# Altium PCB Motor_Driver_HIP4082_Board_V1.3.PcbDoc
Units mil, origin at the board's own origin, x right, y up, seen from the top; angles counter-clockwise.
Board outline 3395.86 x 1840.74 mil, 2 copper layers (Top Layer, Bottom Layer); 63 components, 43 nets, 183 pads, 212 vias.
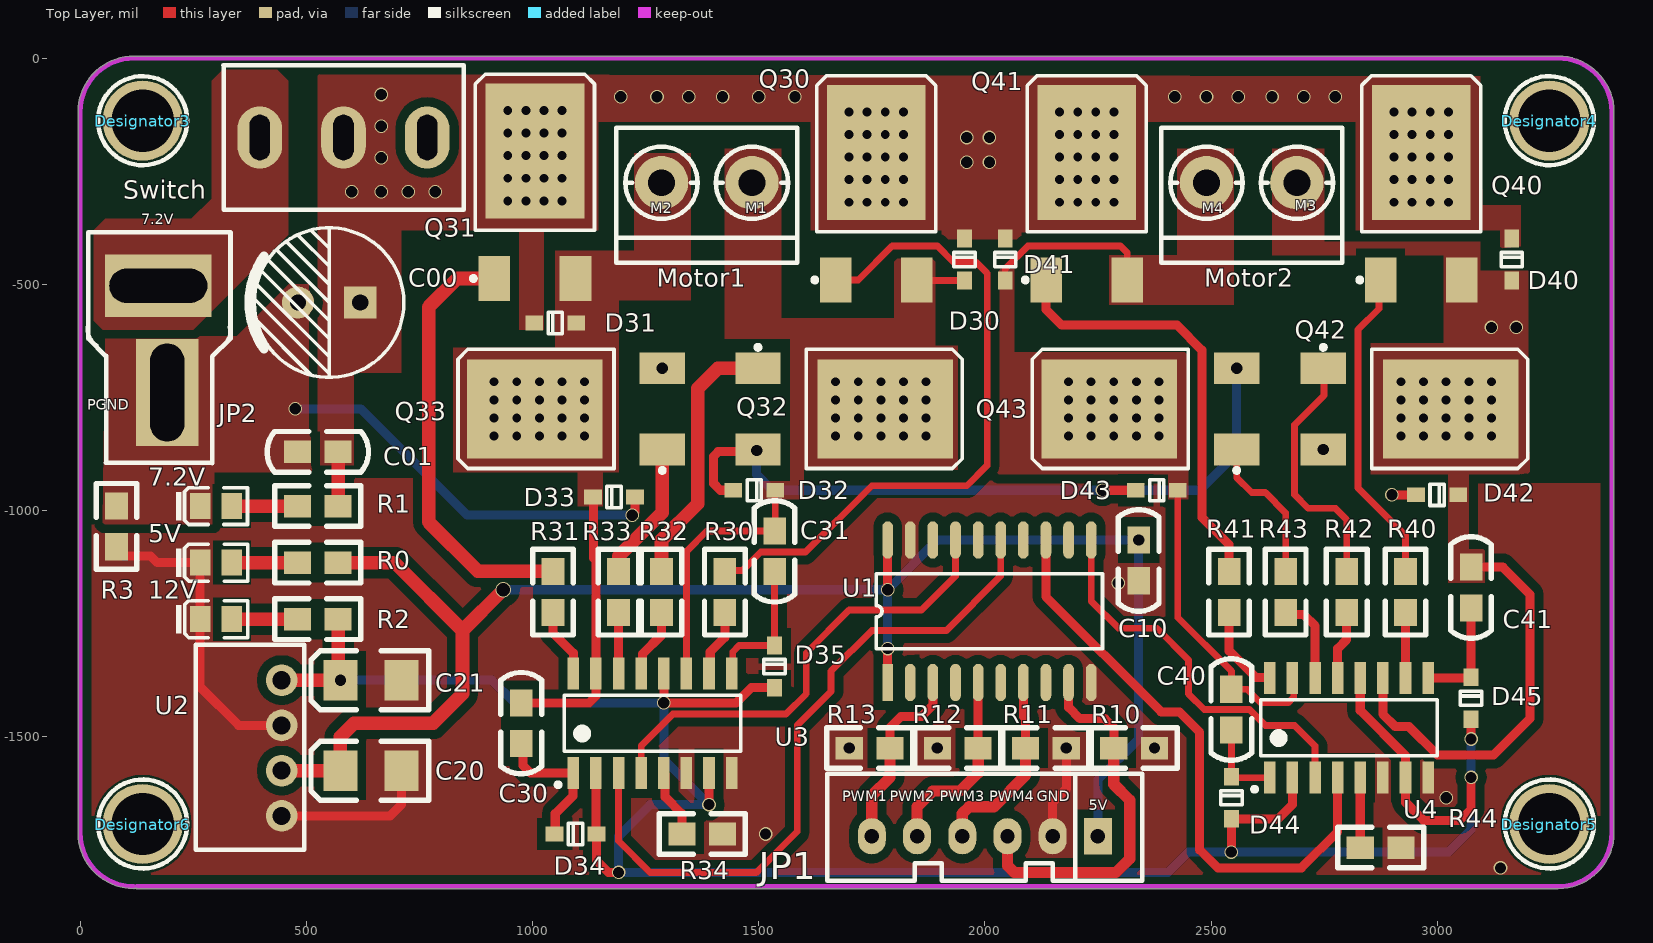
[diagram p0: Top Layer view]
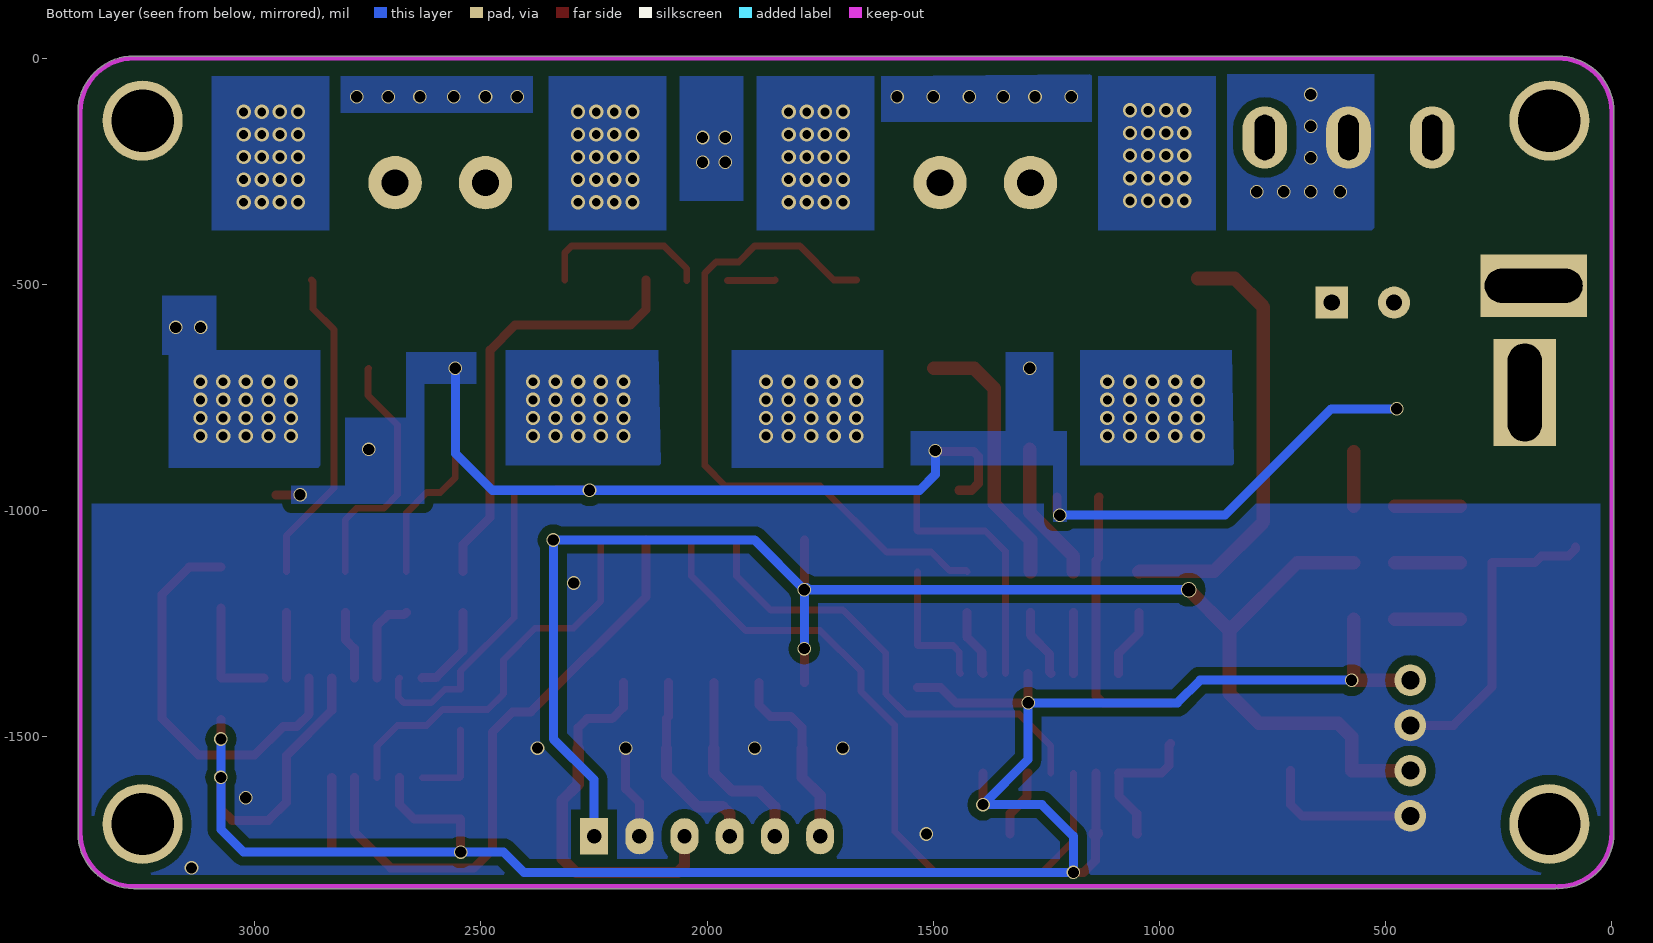
[diagram p1: Bottom Layer view, seen from below]

## Layer stack, top to bottom
Top Solder: solder mask 0.4, Solder Resist, Dk 3.5
Top Layer: signal copper 1.4
Dielectric 1: dielectric 12.6, FR-4, Dk 4.8
Bottom Layer: signal copper 1.4
Bottom Solder: solder mask 0.4, Solder Resist, Dk 3.5

## Board outline
125,-1835.72 cw(c125,-1830.71) 121.56,-1834.35 cw(c118.11,-1830.71) 118.11,-1835.72 cw(c118.11,-1712.6) -5.02,-1712.6 -5.02,-118.11 cw(c118.11,-118.11) 118.11,5.02 3267.72,5.02 cw(c3267.72,-118.11) 3390.84,-118.08 cw(c3385.83,-118.11) 3390.84,-118.11 3390.84,-1712.6 cw(c3385.83,-1712.6) 3390.84,-1712.63 ccw(c3267.72,-1712.6) 3390.84,-1712.6 3390.84,-1712.63 cw(c3267.72,-1712.6) 3267.75,-1835.72 cw(c3267.72,-1712.6) 3267.72,-1835.72 ccw(c3267.72,-1830.71) 3267.75,-1835.72 3267.72,-1835.72

## Design rules (kind name [scope] priority, off if disabled: settings)
Clearance [All] p1: gap=6 ignorepadtopadclearanceinfootprint=FALSE except(0: Arc-Hole Track-Hole SMDPad-Hole THPad-Hole Via-Hole Fill-Hole Poly-Hole Region-Hole Text-Hole; 20: Arc-Poly Track-Poly SMDPad-Poly THPad-Poly Via-Poly Fill-Poly Poly-Poly)
ComponentClearance [All] p1 off: gap=10 collisioncheckmode=3 verticalgap=10 showdistances=FALSE
HoleSize [All] p1 off: absolutevalues=TRUE maxlimit=100 minlimit=1 maxpercent=80.000 minpercent=20.000
MinimumSolderMaskSliver [All] p1 off: minsoldermaskwidth=2
PlaneConnect [All] p1: planeconnectstyle=Direct reliefexpansion=20 reliefentries=4 reliefconductorwidth=10 reliefairgap=10
PolygonConnect [All] p1: connectstyle=Direct reliefconductorwidth=10 reliefentries=4 polygonreliefangle="90 Angle" airgapwidth=10
RoutingVias [All] p1: holewidth=20 width=40 viastyle="Through Hole" minholewidth=10 minwidth=10 maxholewidth=300 maxwidth=300
SilkToSilkClearance [All] p1 off: silktosilkclearance=10
SilkToSolderMaskClearance [IsPad] p1 off: minsilkscreentomaskgap=10 clearancetoexposedcopper=TRUE
SolderMaskExpansion [All] p1: expansion=4
Width POWER [All] p1: maxlimit=150 minlimit=10 preferedwidth=30
Width [All] p2: maxlimit=150 minlimit=8 preferedwidth=15
24 further rules are at their usual default settings.

## Classes and differential pairs
component class Motor_Driver_HIP4082_Board_V1.1: 5V 7.2V 12V C00 C01 C10 C30 C31 C40 C41 D30 D31 D32 D33 D34 D35 D40 D41 D42 D43 D44 D45 JP1 JP2 Motor1 Motor2 Q30 Q31 Q32 Q33 Q40 Q41 Q42 Q43 R0 R1 R2 R3 R10 R11 R12 R13 R30 R31 R32 R33 R34 R40 R41 R42 R43 R44 Switch U1 U2 U3 U4

## Components (designator, comment, footprint, x,y, rotation, side; value= is the part's Value field where it differs from the comment)
5V "" 0805_LED_S1 300,-1115 r0 top
7.2V "" 0805_LED_S1 299.96,-990 r0 top
12V "" 0805_LED_S1 300.04,-1240 r0 top
C00 "470uF/25V" "CAP 3.5*8*11.5 - BK" 550,-540 r180 top
C01 "100nF" 0805C 480,-870 r0 top
C10 "100nF" 0805C 2340,-1065 r270 top
C20 "" 3528 575,-1575 r180 top value=4.7uF
C21 "" 3528 575,-1375 r180 top value=2.2uF
C30 "1uF" 0805C 975,-1515 r90 top
C31 "1uF" 0805C 1535,-1135 r90 top
C40 "1uF" 0805C 2545,-1485 r90 top
C41 "1uF" 0805C 3075,-1215 r90 top
D30 "1N5819" SOD-323 1955,-445 r270 top
D31 "1N5819" SOD-323 1050,-585 r0 top
D32 "1N5819" SOD-323 1490,-955 r180 top
D33 "1N5819" SOD-323 1180,-970 r0 top
D34 "1N5819" SOD-323 1095,-1715 r0 top
D35 "1N5819" SOD-323 1535,-1345 r270 top
D40 "1N5819" SOD-323 3165,-445 r270 top
D41 "1N5819" SOD-323 2045,-445 r270 top
D42 "1N5819" SOD-323 3000,-965 r180 top
D43 "1N5819" SOD-323 2380,-955 r180 top
D44 "1N5819" SOD-323 2545,-1635 r270 top
D45 "1N5819" SOD-323 3075,-1415 r270 top
Designator3 "Comment" HOLE-3.5 137.8,-137.8 r0 top
Designator4 "Comment" HOLE-3.5 3248.03,-137.8 r0 top
Designator5 "Comment" HOLE-3.5 3248.03,-1692.91 r0 top
Designator6 "Comment" HOLE-3.5 137.8,-1692.91 r0 top
JP1 "HEADER 6" SIP6N 2250,-1720 r180 top
JP2 "HEADER 2" T_Type_Adapter 190,-690 r90 top
Motor1 "HEADER 2" KF301-2P 1385,-275 r270 top (schematic designator "Motor 1")
Motor2 "HEADER 2" KF301-2P 2590,-275 r270 top
Q30 "IR7843" LR7843 1759.76,-348.27 r270 top
Q31 "IR7843" LR7843 1005,-345 r270 top
Q32 "IR7843" LR7843 1640,-775 r180 top
Q33 "IR7843" LR7843 1145,-775 r0 top
Q40 "IR7843" LR7843 2964.76,-348.27 r270 top
Q41 "IR7843" LR7843 2225.24,-348.27 r270 top
Q42 "IR7843" LR7843 2890,-775 r180 top
Q43 "IR7843" LR7843 2415,-775 r0 top
R0 "4.7K" 0805 480,-1115 r0 top
R1 "4.7K" 0805 480,-990 r0 top
R2 "4.7K" 0805 480,-1240 r0 top
R3 "0" 0805 80,-990 r270 top
R10 "10K" 0805 2285,-1525 r0 top
R11 "10K" 0805 2180,-1525 r180 top
R12 "10K" 0805 1985,-1525 r180 top
R13 "10K" 0805 1790,-1525 r180 top
R30 "20" 0805 1425,-1135 r270 top
R31 "20" 0805 1045,-1135 r270 top
R32 "20" 0805 1285,-1135 r270 top
R33 "20" 0805 1190,-1225 r90 top
R34 "10K" 0805 1420,-1715 r180 top
R40 "20" 0805 2930,-1135 r270 top
R41 "20" 0805 2540,-1135 r270 top
R42 "20" 0805 2800,-1135 r270 top
R43 "20" 0805 2665,-1225 r90 top
R44 "10K" 0805 2920,-1745 r180 top
Switch "HEADER 2" key 581.85,-175 r180 top
U1 "74HC245" SOP20 1785,-1379.96 r90 top
U2 "B0512S-1W" SIP4_B_S-1W 495,-1297 r180 top
U3 "HIP4082" SOP-16 1265,-1470.24 r90 top
U4 "HIP4082" SOP-16 2805,-1480.24 r90 top

## Footprints (in the part's own frame and the unit in brackets; to place one, negate y for a bottom-side part, rotate by r counter-clockwise, add the part's x,y. Pads: shape width x height; smd on the part's side, far side on the other; paste and mask are expansions set on the pad)
0805 [mil]
  rect 60x50 smd: 1(0,0) 2(90,0)
  silkscreen extent -50,-45 140,45
0805_LED_S1 [mm]
  rect 1.16x1.47 smd: A(0.89,0) K(-0.89,0)
  silkscreen extent -2.24,-1.04 1.77,1.03, body extent -1.01,-0.62 1.01,0.62, height 1.1
0805C [mil]
  rect 60x50 smd: 1(0,0) 2(90,0)
  silkscreen extent -67,-45 157,45
3528 [mil]
  rect 75x90 smd: 1(0,0) 2(-135,0)
  silkscreen extent -195,-65 65,65
"CAP 3.5*8*11.5 - BK" [mm] "脚距3.5mm直径8mm高度11.5mm"
  rect 1.8x1.8 hole 0.9: 1(-1.75,0)
  round 1.8 hole 0.9: 2(1.75,0)
  silkscreen extent -4.2,-4.2 4.5,4.2, body extent -4,-4 4.01,4, height 11.54
HOLE-3.5 [mm]
  round 4.5 hole 3.5: 0(0,0)
  silkscreen extent -2.5,-2.5 2.5,2.5
key [mm]
  oval 2.5x3.5 hole 1.143 slot 2.54 at 90 deg: 1(4.7,0) 2(0,0) 3(-4.7,0)
  silkscreen extent -6.75,-4.05 6.75,4.05
KF301-2P [mm]
  round 3 hole 1.5: 1(0,-2.54) 2(0,2.54)
  silkscreen extent -3.1,-5.08 4.5,5.08
LR7843 [mm]
  rect 7.6x5.55 smd: 1(-3.556,0)
  rect 2.54x1.778 smd: 2(3.6,-2.28) 3(3.6,2.28)
  silkscreen extent -7.87,-3.58 3.72,3.35
SIP4_B_S-1W [mil]
  round 70 hole 40: 1(50,378) 2(50,278) 3(50,178) 4(50,78)
  silkscreen extent 0,0 240,453
SIP6N [mil]
  rect 62x80 hole 32: 1(0,0)
  oval 62x80 hole 32: 2(100,0) 3(200,0) 4(300,0) 5(400,0) 6(500,0)
  silkscreen extent -98,-138 598,98
SOD-323 [mm]
  rect 1x0.83 smd: 1(1.18,0) 2(-1.18,0)
  silkscreen extent -0.4,-0.6 0.4,0.6, body extent -1.35,-0.62 1.35,0.63, height 1.1
SOP20 [mm]
  rect 2.1x0.6 smd: 1(0,0)
  oval 2.1x0.6 smd: 2(0,-1.27) 3(0,-2.54) 4(0,-3.81) 5(0,-5.08) 6(0,-6.35) 7(0,-7.62) 8(0,-8.89) 9(0,-10.16) 10(0,-11.43) 11(8,-11.43) 12(8,-10.16) 13(8,-8.89) 14(8,-7.62) 15(8,-6.35) 16(8,-5.08) 17(8,-3.81) 18(8,-2.54) 19(8,-1.27) 20(8,0)
  silkscreen extent 1.89,-12.06 6.11,0.64
SOP-16 [mm] "SOIC,1.27mm pitch;16 pin,3.90mm W X 9.90mm L X 1.65mm H body"
  rect 1.8x0.65 smd: 1(-2.8,4.445) 2(-2.8,3.175) 3(-2.8,1.905) 4(-2.8,0.635) 5(-2.8,-0.635) 6(-2.8,-1.905) 7(-2.8,-3.175) 8(-2.8,-4.445) 9(2.8,-4.445) 10(2.8,-3.175) 11(2.8,-1.905) 12(2.8,-0.635) 13(2.8,0.635) 14(2.8,1.905) 15(2.8,3.175) 16(2.8,4.445)
  silkscreen extent -3.57,-4.95 1.58,5.42, body extent -3.11,-4.95 3.11,4.95, height 1.75
T_Type_Adapter [mm]
  rect 6x3.5 hole 1.905 slot 5.49 at 0 deg: 1(-1.245,-0.051)
  rect 3.5x6 hole 1.905 slot 5.49 at 90 deg: 2(4.755,0.449)
  silkscreen extent -5.21,-3.61 7.77,4.42

## Part data
5V 7.2V 12V: library part LED
C00: library part CAPACITOR, "Capacitor"
C01 C10 C30 C31 C40 C41: library part CAP, "Capacitor"
C20 C21: library part "Cap Pol3", "Polarized Capacitor (Surface Mount)", LatestRevisionDate=29-May-2009, LatestRevisionNote="IPC-7351 Footprint Added.", PackageDescription="Chip Capacitor", PackageReference=C0805, Published=8-Jun-2000, Publisher="Altium Limited"
D30 D31 D32 D33 D34 D35 D40 D41 D42 D43 D44 D45: library part "DIODE SCHOTTKY", "Schottky Diode"
Q30 Q31 Q32 Q33 Q40 Q41 Q42 Q43: library part MOSFET-N, "N-Channel MOSFET", LatestRevisionDate=17-Jul-2002, LatestRevisionNote="Re-released for DXP Platform.", PackageDescription="TO, Flat Index; 3 In-Line, Axial Leads; Body Dia. 4.6mm; Lead Dia. 0.5 mm (max)", PackageReference=E3, PackageVersion=1995/1996, Published=8-Jun-2000, Publisher="Altium Limited"
R0 R1 R2 R3 R10 R11 R12 R13 R30 R31 R32 R33 R34 R40 R41 R42 R43 R44: library part RES2
U2: library part "4 HEADER", "4 Pin Header"

## Via types
v1: diameter 31.5, hole 19.68, Top Layer to Bottom Layer, 160 vias
v2: diameter 30, hole 25, Top Layer to Bottom Layer, 51 vias
v3: diameter 35, hole 30, Top Layer to Bottom Layer, 1 vias

## Nets (pads, with @x,y where several pads share a name; then routed paths per layer and width w, separated by ;. In a path a pad name is that pad's centre, name@x,y a point inside that pad or via, vN(x,y) a via of type N, cw(c..) or ccw(c..) an arc to the next point about the centre after c; other vN are vias at no path point)
5V: C10.1 C20.1 JP1.1 R0.2 U1.1 U1.20 U2.2 | length 3580.7
  Top Layer w20: U1.1 v2(1785,-1305) ; v2(1785,-1175) U1.20
  Top Layer w30: U2.2 C20.1 575,-1500 605,-1470 780,-1470 845,-1405 845,-1265 ; R0.2 695,-1115 845,-1265 ; v3(935,-1175) 845,-1265
  Bottom Layer w20: v3(935,-1175) 1775,-1175 1780,-1170 v2(1785,-1175) ; v2(1785,-1305) v2(1785,-1175) ; JP1.1 2250,-1595 2340,-1505 v2(2340,-1065) 1895,-1065 v2(1785,-1175)
7.2V: C00.1 C01.2 D30.2 D31.2 D40.2 D41.2 Q30.1 Q31.1 Q40.1 Q41.1 R1.2 Switch.2 | length 120
  Top Layer w30: R1.2 C01.2
  other v1: 1699.76,-318.27 1739.76,-318.27 1779.76,-318.27 1819.76,-318.27 2165.24,-318.27 2205.24,-318.27 2245.24,-318.27 2285.24,-318.27 2904.76,-318.27 2944.76,-318.27 2984.76,-318.27 3024.76,-318.27 945,-315 985,-315 1025,-315 1065,-315 1699.76,-268.27 1739.76,-268.27 1779.76,-268.27 1819.76,-268.27 2165.24,-268.27 2205.24,-268.27 2245.24,-268.27 2285.24,-268.27 2904.76,-268.27 2944.76,-268.27 2984.76,-268.27 3024.76,-268.27 945,-265 985,-265 1025,-265 1065,-265 1699.76,-218.27 1739.76,-218.27 1779.76,-218.27 1819.76,-218.27 2165.24,-218.27 2205.24,-218.27 2245.24,-218.27 2285.24,-218.27 2904.76,-218.27 2944.76,-218.27 2984.76,-218.27 3024.76,-218.27 945,-215 985,-215 1025,-215 1065,-215 1699.76,-168.27 1739.76,-168.27 1779.76,-168.27 1819.76,-168.27 2165.24,-168.27 2205.24,-168.27 2245.24,-168.27 2285.24,-168.27 2904.76,-168.27 2944.76,-168.27 2984.76,-168.27 3024.76,-168.27 945,-165 985,-165 1025,-165 1065,-165 1699.76,-118.27 1739.76,-118.27 1779.76,-118.27 1819.76,-118.27 2165.24,-118.27 2205.24,-118.27 2245.24,-118.27 2285.24,-118.27 2904.76,-118.27 2944.76,-118.27 2984.76,-118.27 3024.76,-118.27 945,-115 985,-115 1025,-115 1065,-115
  other v2: 600,-295 665,-295 725,-295 785,-295 1960,-230 2010,-230 665,-220 1960,-175 2010,-175 665,-150 1195,-85 1275,-85 1345,-85 1420,-85 1500,-85 1580,-85 2420,-85 2490,-85 2560,-85 2635,-85 2705,-85 2775,-85 665,-80
"7.2V In": JP2.2 Switch.1
12V: C21.1 D34.1 D35.1 D44.1 D45.1 R2.2 U2.4 U3.2 U3.7 U3.12 U4.2 U4.7 U4.12 | length 5232.3
  Top Layer w20: D34.1@1140,-1713.66 U3.2 ; D34.1 1141.46,-1773.75 1167.71,-1800 v2(1190,-1800) ; U3.12 v2(1290,-1425) 1450,-1425 1483.54,-1391.46 D35.1 ; v2(1390,-1650) U3.7 ; v2(2545,-1755) D44.1 2648.54,-1681.46 2680,-1650 U4.2 ; U4.12 2830,-1441.77 2930,-1541.77 U4.7 2930,-1645 2970,-1685 3050,-1685 3075,-1660 v2(3075,-1590) ; v2(3075,-1505) D45.1
  Top Layer w30: U2.4 v2(575,-1375) 570,-1370 R2.2 ; D34.1@1140,-1713.66 1141.34,-1715 D34.1
  Bottom Layer w20: v2(575,-1375) 910,-1375 960,-1425 v2(1290,-1425) 1290,-1550 v2(1390,-1650) 1260,-1650 1190,-1720 v2(1190,-1800) 2405,-1800 2450,-1755 v2(2545,-1755) 3025,-1755 3075,-1705 v2(3075,-1590) v2(3075,-1505)
AHO1: R30.2 U3.10 | length 149.5
  Top Layer w20: U3.10 1392.8,-1357.2 1392.8,-1312.2 1425,-1280 R30.2
AHO2: R40.2 U4.10 | length 145
  Top Layer w20: U4.10 R40.2
AHS1: C31.2 D30.1 D32.2 Motor1.2 Q30.3 Q32.1 U3.11 | length 680.3
  Top Layer w15: U3.11 1340,-1090 1385,-1045 C31.2 1536.46,-1043.54 D32.2 ; Q30.3 1850.98,-491.46 D30.1
  other v1: 1670,-835 1720,-835 1770,-835 1820,-835 1870,-835 1670,-795 1720,-795 1770,-795 1820,-795 1870,-795 1670,-755 1720,-755 1770,-755 1820,-755 1870,-755 1670,-715 1720,-715 1770,-715 1820,-715 1870,-715
AHS2: C41.2 D40.1 D42.2 Motor2.2 Q40.3 Q42.1 U4.11 | length 905.3
  Top Layer w20: U4.11 2880,-1450 2907.31,-1477.31 2937.69,-1477.31 2999.42,-1539.04 3000.38,-1540 3125,-1540 3205,-1460 3205,-1185 3145,-1125 C41.2
  other v1: 2920,-835 2970,-835 3020,-835 3070,-835 3120,-835 2920,-795 2970,-795 3020,-795 3070,-795 3120,-795 2920,-755 2970,-755 3020,-755 3070,-755 3120,-755 2920,-715 2970,-715 3020,-715 3070,-715 3120,-715
  other v2: 3120,-595 3175,-595
ALO1: R32.2 U3.13 | length 153.6
  Top Layer w20: U3.13 1242.8,-1357.2 1242.8,-1317.2 1285,-1275 R32.2
ALO2: R42.2 U4.13 | length 153.3
  Top Layer w20: U4.13 2780,-1305 2800,-1285 R42.2
BHO1: R31.2 U3.16 | length 153.6
  Top Layer w20: R31.2 1045,-1270 1090,-1315 U3.16
BHO2: R41.2 U4.16 | length 199.9
  Top Layer w20: R41.2 2540,-1310 2598.92,-1368.92 2628.92,-1368.92 U4.16
BHS1: C30.2 D31.1 D33.2 Motor1.1 Q31.3 Q33.1 U3.15 | length 613.9
  Top Layer w20: C30.2 1125,-1425 1140,-1410 U3.15 1140,-1110 1135,-1105 1135,-971.46 D33.2
  other v1: 915,-835 965,-835 1015,-835 1065,-835 1115,-835 915,-795 965,-795 1015,-795 1065,-795 1115,-795 915,-755 965,-755 1015,-755 1065,-755 1115,-755 915,-715 965,-715 1015,-715 1065,-715 1115,-715
BHS2: C40.2 D41.1 D43.2 Motor2.1 Q41.3 Q43.1 U4.15 | length 1071.5
  Top Layer w15: D41.1 2045,-465 2095,-415 2300,-415 2315,-430 Q41.3 ; D43.2 2426.46,-1236.46 2545,-1355 C40.2 2580,-1395 2610,-1425 2670,-1425 2682.91,-1412.09 2682.91,-1372.91 U4.15
  other v1: 2185,-835 2235,-835 2285,-835 2335,-835 2385,-835 2185,-795 2235,-795 2285,-795 2335,-795 2385,-795 2185,-755 2235,-755 2285,-755 2335,-755 2385,-755 2185,-715 2235,-715 2285,-715 2335,-715 2385,-715
BLO1: R33.1 U3.14 | length 135
  Top Layer w20: U3.14 R33.1
BLO2: R43.1 U4.14 | length 192.4
  Top Layer w20: R43.1 2670,-1230 2705,-1230 2730,-1255 U4.14
GND: 5V.K 12V.K C10.2 C20.2 C21.2 JP1.2 R3.2 R10.2 R11.1 R12.2 R13.2 R34.1 R44.1 U1.10 U1.19 U2.1 U2.3 U3.6 U3.8 U4.6 U4.8 | length 1250.4
  Top Layer w20: R3.2 80,-1085 95,-1100 155,-1100 170,-1115 5V.K 5V.K 12V.K 265,-1390 350,-1475 U2.3 ; U2.1 685,-1675 710,-1650 C20.2 ; JP1.2 2150,-1645 2180,-1615 v2(2180,-1525)
  other v2: 3140,-1790 1515,-1715 3020,-1635 1700,-1525 1895,-1525 2375,-1525 2295,-1160
"Motor In1": U1.17 U3.4 | length 1043.5
  Top Layer w15: U3.4 1240,-1520 1310,-1450 1560,-1450 1605,-1405 1605,-1315 1700,-1220 1860,-1220 1935,-1145 U1.17
"Motor In2": U1.15 U3.3 | length 1538.9
  Top Layer w15: U3.3 1190,-1730 1260,-1800 1495,-1800 1585,-1710 1585,-1475 1660,-1400 1660,-1355 1750,-1265 1915,-1265 2035,-1145 U1.15
"Motor In3": U1.13 U4.4 | length 1323.5
  Top Layer w20: U1.13 2135,-1190 2390,-1445 2430,-1445 2475,-1490 2475,-1750 2515,-1790 2700,-1790 2780,-1710 U4.4
"Motor In4": U1.11 U4.3 | length 877
  Top Layer w15: U1.11 2235,-1200 2295,-1260 2380,-1260 2450,-1330 2450,-1405 2485,-1440 2585,-1440 2620,-1475 2685,-1475 2730,-1520 U4.3
Net5V_A: 5V.A R0.1 | length 145
  Top Layer w30: 5V.A R0.1
Net7.2V_A: 7.2V.A R1.1 | length 145
  Top Layer w30: 7.2V.A R1.1
Net12V_A: 12V.A R2.1 | length 144.9
  Top Layer w30: 12V.A R2.1
NetC30_1: C30.1 D34.2 U3.1 | length 320.2
  Top Layer w20: C30.1 978.28,-1518.28 978.28,-1563.28 995,-1580 1089.53,-1580 U3.1 1089.44,-1581.04 1089.44,-1630.56 1050,-1670 1050,-1713.54 D34.2
NetC31_1: C31.1 D35.2 U3.9 | length 310.4
  Top Layer w15: U3.9 1442.52,-1357.48 1442.52,-1312.48 1456.46,-1298.54 D35.2 C31.1
NetC40_1: C40.1 D44.2 U4.1 | length 189.3
  Top Layer w15: C40.1 D44.2 2546.93,-1590.47 U4.1
NetC41_1: C41.1 D45.2 U4.9 | length 249.1
  Top Layer w20: U4.9 3073.54,-1370 D45.2 C41.1
NetQ30_2: Q30.2 R30.1 | length 1493.3
  Top Layer w15: R30.1 1427.8,-1132.2 1463.71,-1132.2 1504.41,-1091.5 1603.5,-1091.5 1750,-945 1960,-945 2005,-900 2005,-475 1980,-450 1930,-450 1895,-415 1795,-415 1720,-490 Q30.2
NetQ31_2: Q31.2 R31.1 | length 967
  Top Layer w30: Q31.2 833.27,-486.73 770,-550 770,-1025 879,-1134 1044,-1134 R31.1
NetQ32_2: Q32.2 R32.1 | length 589.9
  Top Layer w30: R32.1 1285,-1065 1365,-985 1365,-730 1409.76,-685.24 Q32.2
NetQ33_2: Q33.2 R33.2 | length 310.3
  Top Layer w30: R33.2 1190,-1100.91 1286.73,-1004.18 Q33.2
NetQ40_2: Q40.2 R40.1 | length 709.2
  Top Layer w15: Q40.2 2871.29,-493.71 2871.29,-553.71 2825,-600 2825,-950 2930,-1055 R40.1
NetQ41_2: Q41.2 R41.1 | length 962.3
  Top Layer w20: Q41.2 2135,-490.47 2135,-555 2170,-590 2425,-590 2480,-645 2480,-1015 2540,-1075 R41.1
NetQ42_2: Q42.2 R42.1 | length 560.4
  Top Layer w15: Q42.2 2750,-686.97 2750,-745 2684.77,-810.23 2684.77,-964.77 2715,-995 2775,-995 2800,-1020 R42.1
NetQ43_2: Q43.2 R43.2 | length 332.7
  Top Layer w15: Q43.2 2556.73,-926.73 2590,-960 2620,-960 2665,-1005 R43.2
NetR34_2: R34.2 U3.5 | length 151.1
  Top Layer w20: U3.5 1292.8,-1583.27 1292.8,-1632.8 1330,-1670 R34.2
NetR44_2: R44.2 U4.5 | length 154.5
  Top Layer w20: R44.2 U4.5
PGND: 7.2V.K C00.2 C01.1 D32.1 D33.1 D42.1 D43.1 JP2.1 Q32.3 Q33.3 Q42.3 Q43.3 R3.1 | length 2577.6
  Top Layer w20: v2(1220,-1010) 1226.46,-1003.54 D33.1 ; D32.1 1415,-955 1400,-940 1400,-880 1410.28,-869.72 1493.31,-869.72 v2(1495.79,-867.24) Q32.3 ; v2(2260,-955) D43.1 ; v2(2900,-965) D42.1
  Bottom Layer w20: v2(475,-775) 620,-775 855,-1010 v2(1220,-1010) ; v2(1495.79,-867.24) 1495,-868.03 1495,-920 1530,-955 v2(2260,-955) 2475,-955 2556.73,-873.27 v2(2556.73,-685.24)
  other v2: 2748.27,-864.76 1286.73,-685.24
PWM1: JP1.6 R13.1 U1.3 | length 422.3
  Top Layer w20: R13.1 1790,-1480 1815,-1455 1860,-1455 1885,-1430 U1.3
  Top Layer w25: JP1.6 1750,-1630 1790,-1590 R13.1
PWM2: JP1.5 R12.1 U1.5 | length 431.1
  Top Layer w20: R12.1 U1.5
  Top Layer w25: JP1.5 1850,-1655 1885,-1620 1945,-1620 1985,-1580 R12.1
PWM3: JP1.4 R11.2 U1.7 | length 432.3
  Top Layer w20: U1.7 2085,-1455 2090,-1460 R11.2
  Top Layer w25: JP1.4 1950,-1670 1965,-1655 2020,-1655 2090,-1585 R11.2
PWM4: JP1.3 R10.1 U1.9 | length 831.8
  Top Layer w20: U1.9 2185,-1435 2210,-1460 2265,-1460 2285,-1480 R10.1
  Top Layer w25: JP1.3 2050,-1785 2065,-1800 2290,-1800 2320,-1770 2320,-1640 2285,-1605 R10.1
pads on no net: Designator3.0 Designator4.0 Designator5.0 Designator6.0 Switch.3 U1.2 U1.4 U1.6 U1.8 U1.12 U1.14 U1.16 U1.18

## Polygon pours and split planes (outlines as drawn)
GND on Top Layer "Top Layer-No Net" (solid, remove dead copper, pour order 148): -75,-925 3560,-940 3560,-1905 3555,-1910 3535,-1890 -80,-1890
7.2V on Top Layer "Top Layer-No Net" (solid, remove dead copper, pour order 114): 3140,-420 3185,-420 3185,-415 3185,-325 3100,-325 3095,-40 525,-35 525,-900 605,-900 605,-695 710,-695 710,-380 1145,-380 1145,-140 1615,-140 1615,-380 1905,-380 1905,-400 2080,-400 2080,-385 2355,-385 2360,-140 2820,-140 2820,-380 3140,-380 3140,-420 3185,-420 3185,-415
7.2V on Top Layer "Top Layer-No Net" (solid, remove dead copper, pour order 146): 970,-295 970,-600 1025,-600 1025,-340 1040,-340 1040,-295
BHS1 on Top Layer "Top Layer-No Net" (solid, remove dead copper, pour order 100): 1225,-210 1225,-425 1050,-425 1050,-640 830,-640 825,-640 825,-915 1190,-915 1190,-535 1350,-535 1350,-530 1350,-520 1350,-210
AHS1 on Top Layer "Top Layer-No Net" (solid, remove dead copper, pour order 104): 1425,-200 1550,-200 1550,-575 1800,-575 1800,-435 1890,-435 1890,-635 1940,-635 1940,-910 1600,-910 1600,-975 1510,-975 1510,-935 1570,-935 1570,-620 1425,-620
PGND on Top Layer "Top Layer-No Net" (solid, remove dead copper, pour order 116): 50,-1030 295.72,-1030 295.72,-915 515.72,-915 515.72,-500 460.72,-500 346.25,-614.48 54.94,-614.48
AHS2 on Top Layer "Top Layer-No Net" (solid, remove dead copper, pour order 110): 3015,-435 3095,-435 3095,-470 3201.96,-470 3201.96,-630 3201.96,-655 3204.4,-920 3070,-920 3070,-1085 3105,-1085 3105,-1160 3025,-1160 3025,-920 2850,-920 2850,-630 3015,-630
AHS2 on Top Layer "Top Layer-No Net" (solid, remove dead copper, pour order 112): 2635,-200 2750,-200 2750,-405 3095,-405 3095,-435 2635,-435
BHS2 on Top Layer "Top Layer-No Net" (solid, remove dead copper, pour order 108): 2425,-435 2425,-200 2550,-200 2550,-545 2275,-545 2275,-435
BHS2 on Top Layer "Top Layer-No Net" (solid, remove dead copper, pour order 106): 2405,-975 2450,-975 2450,-650 2065,-650 2065,-465 2025,-465 2025,-915 2030,-920 2405,-920
BHS1 on Top Layer "Top Layer-No Net" (solid, remove dead copper, pour order 102): 1100,-815 1100,-990 1155,-990 1155,-815
7.2V on Top Layer "P" (solid, remove dead copper, pour order 4): 565,-445 565,-595 675,-595 675,-445
"7.2V In" on Top Layer "P" (solid, remove dead copper, pour order 6): 50,-600 250,-600 430,-420 460,-390 460,-50 430,-20 320,-20 290,-50 290,-310 245,-355 55,-355 30,-380 30,-580
7.2V on Top Layer "GG" (solid, remove dead copper, pour order 82): 565,-595 675,-595 620,-650 618.9,-650 618.9,-648.9 565,-595
GND on Bottom Layer "Top Layer-No Net" (solid, remove dead copper, pour order 144): -105,-930 -50,-985 3880,-985 3880,-1935 3815,-2000 -105,-2000
AHS2 on Bottom Layer "Top Layer-No Net" (solid, remove dead copper, pour order 164): 3085,-655 3085,-525 3205,-525 3205,-655
no net on Bottom Layer "Top Layer-No Net" (solid, remove dead copper, pour order 162): 3090,-475
7.2V on Bottom Layer "Top Layer-No Net" (solid, remove dead copper, pour order 160): 2385,-40 2385,-120 2810,-120 2810,-40
7.2V on Bottom Layer "Top Layer-No Net" (solid, remove dead copper, pour order 158): 1920,-40 1920,-315 2060,-315 2060,-40
7.2V on Bottom Layer "Top Layer-No Net" (solid, remove dead copper, pour order 156): 1150,-35 1150,-140 1615,-140 1615,-40
7.2V on Bottom Layer "Top Layer-No Net" (solid, remove dead copper, pour order 154): 525,-35 525,-375 530,-380 850,-380 850,-40 850,-35
PGND on Bottom Layer "Top Layer-No Net" (solid, remove dead copper, pour order 138): 1235,-650 1340,-650 1340,-825 1550,-825 1550,-900 1235,-900 1235,-1025 1205,-1025 1205,-825 1210,-825 1235,-825
PGND on Bottom Layer "Top Layer-No Net" (solid, remove dead copper, pour order 136): 2510,-650 2510,-720 2625,-720 2625,-985 2920,-985 2920,-945 2800,-945 2800,-795 2665,-795 2665,-650
no net on Bottom Layer "Top Layer-No Net" (solid, remove dead copper, pour order 132): 2510,-650
7.2V on Bottom Layer "Top Layer-No Net" (solid, remove dead copper, pour order 126): 2835,-40 2835,-380 3095,-380 3095,-40
7.2V on Bottom Layer "Top Layer-No Net" (solid, remove dead copper, pour order 122): 2090,-40 2090,-380 2350,-380 2350,-40
7.2V on Bottom Layer "Top Layer-No Net" (solid, remove dead copper, pour order 120): 1630,-40 1630,-380 1890,-380 1890,-40
7.2V on Bottom Layer "Top Layer-No Net" (solid, remove dead copper, pour order 118): 875,-40 875,-380 1135,-380 1135,-40
AHS2 on Bottom Layer "P" (solid, remove dead copper, pour order 26): 2855,-645 3190,-645 3190,-905 2860,-905 2855,-900
BHS2 on Bottom Layer "P" (solid, remove dead copper, pour order 24): 2107.55,-645 2445,-645 2445,-900 2102.55,-900
AHS1 on Bottom Layer "P" (solid, remove dead copper, pour order 22): 1610,-645 1610,-905 1945,-905 1945,-645
BHS1 on Bottom Layer "P" (solid, remove dead copper, pour order 20): 840,-645 1175,-645 1175,-900 835,-900

## Keep-outs
Keep-Out Layer:
  lines w10: 118.11,-1830.71 cw(c118.11,-1712.6) 0,-1712.6 0,-118.11 cw(c118.11,-118.11) 118.11,0 3267.72,0 cw(c3267.72,-118.11) 3385.83,-118.11 3385.83,-1712.6 cw(c3267.72,-1712.6) 3267.72,-1830.71 125,-1830.71
Mechanical 1:
  lines w10: 118.11,-1830.71 cw(c118.11,-1712.6) 0,-1712.6 0,-118.11 cw(c118.11,-118.11) 118.11,0 ; 125,-1830.71 3267.72,-1830.71 ccw(c3267.72,-1712.6) 3385.83,-1712.6 3385.83,-118.11 ccw(c3267.72,-118.11) 3267.72,0 ; 118.11,0 3267.72,0 ; 118.11,0 3267.72,0

## Other copper
Top Layer:

## Silkscreen, mask and mechanical layers (free items; w line width, h text height)
Top Overlay:
  text "M3" at 2685,-345 h40
  text "M2" at 1260,-350 h40
  text "M1" at 1470,-350 h40
  text "M4" at 2480,-350 h40
  text "7.2V" at 135,-375 h40
  text "PGND" at 15,-785 h40
  text "PWM1" at 1685,-1650 h40
  text "PWM2" at 1790,-1650 h40
  text "PWM3" at 1900,-1650 h40
  text "PWM4" at 2010,-1650 h40
  text "GND" at 2115,-1650 h40
  text "5V" at 2230,-1670 h40

## Dimensions
118.11,0 to 125,-1830.71 on Mechanical 1
0,-118.11 to 3385.83,-118.11 on Mechanical 1